# Altium PCB ArtFire.PcbDoc
Units mm, origin at the board's own origin, x right, y up, seen from the top; angles counter-clockwise.
Board outline 100.33 x 88.9 mm, 2 copper layers (Top Layer, Bottom Layer); 100 components, 80 nets, 357 pads, 159 vias.
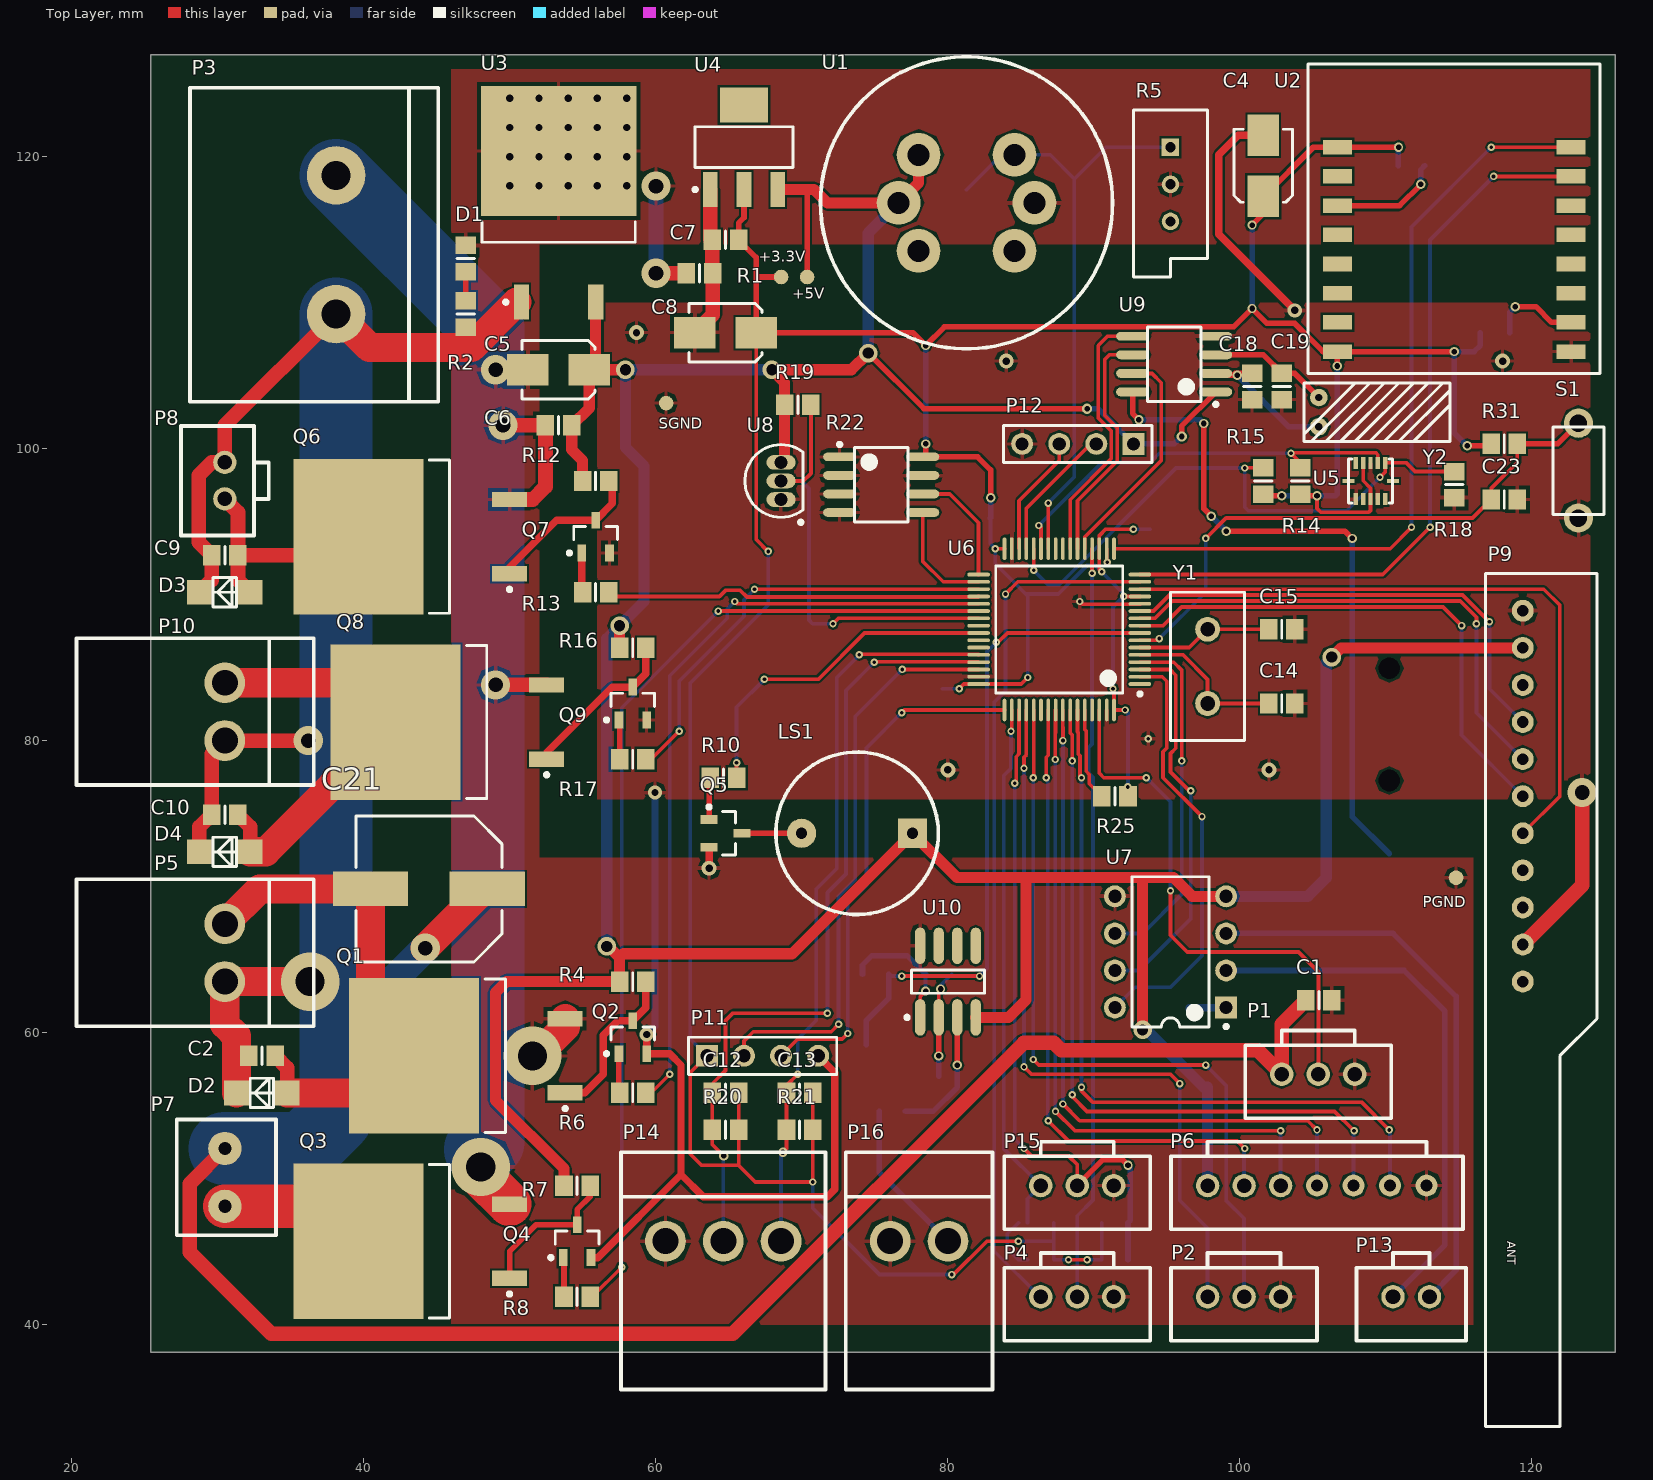
[diagram p0: Top Layer view]
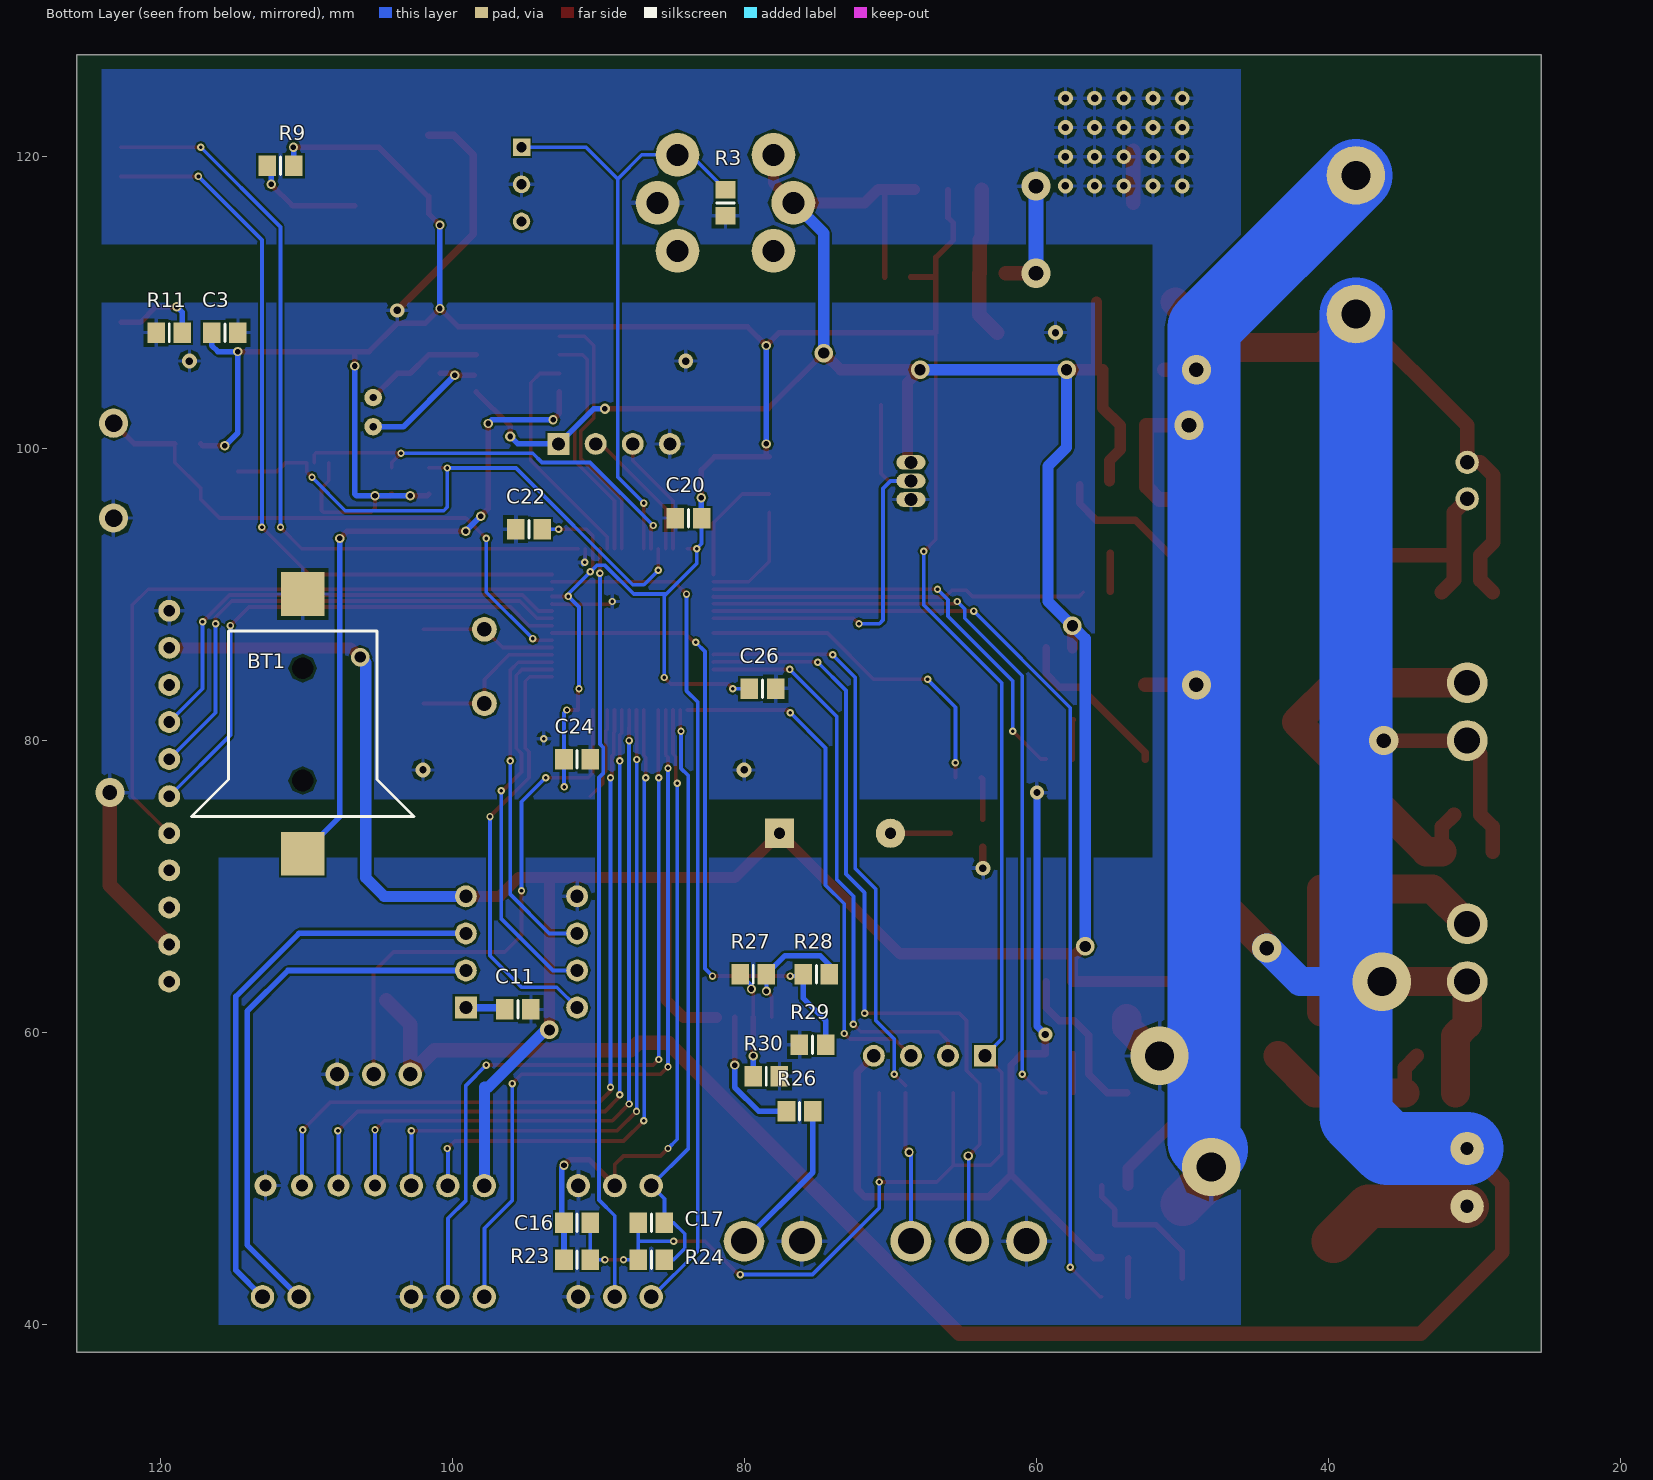
[diagram p1: Bottom Layer view, seen from below]

## Layer stack, top to bottom
Top Solder: solder mask 0.0102, Solder Resist, Dk 3.5
Top Layer: signal copper 0.0356
Dielectric 1: dielectric 0.32, FR-4, Dk 4.8
Bottom Layer: signal copper 0.0356
Bottom Solder: solder mask 0.0102, Solder Resist, Dk 3.5

## Board outline
25.4,38.1 125.73,38.1 125.73,127 25.4,127

## Design rules (kind name [scope] priority, off if disabled: settings)
Clearance [All] p1: gap=0.152
PolygonConnect [All] p1: connectstyle=Relief reliefconductorwidth=0.254 reliefentries=4 polygonreliefangle="90 Angle" airgapwidth=0.254
RoutingVias [All] p1: holewidth=0.254 width=0.254 viastyle="Through Hole" minholewidth=0.254 minwidth=0.483 maxholewidth=10 maxwidth=10
SolderMaskExpansion [All] p1: expansion=0.102
UnpouredPolygon [All] p1: allowunpoured=FALSE
Width [All] p1: maxlimit=10 minlimit=0.25 preferedwidth=0.25
29 further rules are at their usual default settings.

## Components (designator, comment, footprint, x,y, rotation, side; value= is the part's Value field where it differs from the comment)
BT1 "Battery" Battery_1302 110.236,72.263 r90 bottom
C1 "Cap Semi" 6-0805_N 105.41,62.23 r0 top
C2 "Cap Semi" 6-0805_N 33.02,58.42 r0 top
C3 "Cap Semi" 6-0805_N 115.57,107.95 r180 bottom
C4 "Cap Pol1" Cap_5*4mm 101.6,119.38 r90 top
C5 "Cap Pol1" Cap_5*4mm 53.34,105.41 r180 top
C6 "Cap Semi" 6-0805_N 53.34,101.6 r180 top
C7 "Cap Semi" 6-0805_N 64.77,114.3 r180 top
C8 "Cap Pol1" Cap_5*4mm 64.77,107.95 r180 top
C9 "Cap Semi" 6-0805_N 30.48,92.71 r0 top
C10 "Cap Semi" 6-0805_N 30.48,74.93 r0 top
C11 "Cap Semi" 6-0805_N 95.504,61.595 r0 bottom
C12 "Cap Semi" 6-0805_N 64.77,55.88 r0 top
C13 "Cap Semi" 6-0805_N 69.85,55.88 r0 top
C14 "Cap Semi" 6-0805_N 102.87,82.55 r0 top
C15 "Cap Semi" 6-0805_N 102.87,87.63 r0 top
C16 "Cap Semi" 6-0805_N 91.44,46.99 r180 bottom
C17 "Cap Semi" 6-0805_N 86.36,46.99 r0 bottom
C18 "Cap Semi" 6-0805_N 100.838,104.267 r90 top
C19 "Cap Semi" 6-0805_N 102.87,104.267 r90 top
C20 "Cap Semi" 6-0805_N 83.82,95.25 r0 bottom
C21 "Cap Pol1" CAP_10*10MM 44.45,69.85 r180 top
C22 "Cap Semi" 6-0805_N 94.742,94.488 r0 bottom
C23 "Cap Semi" 6-0805_N 118.11,96.52 r180 top
C24 "Cap Semi" 6-0805_N 91.44,78.74 r180 bottom
C26 "Cap Semi" 6-0805_N 78.74,83.566 r180 bottom
D1 "PWR" 6-0805_N 46.99,113.03 r90 top
D2 "Diode" US1M 33.02,55.88 r180 top
D3 "Diode" US1M 30.48,90.17 r180 top
D4 "Diode" US1M 30.48,72.39 r180 top
LS1 "Buzzer" BUZZER 73.787,73.66 r0 top
P1 "Pump1" XH2.54-3P 102.87,57.15 r0 top
P2 "Alcohol_Detect" XH2.54-3P 97.79,41.91 r0 top
P3 "HB-9500" HB-9500 38.1,109.22 r90 top
P4 "Alcohol_Detect_C" XH2.54-3P 86.36,41.91 r0 top
P5 "Pump2" CH3.96_2P 30.48,63.5 r90 top
P6 "XH2.54-7P" XH2.54-7P 97.79,49.53 r0 top
P7 "Fire_Up" KF3.96_2P 30.48,52.07 r0 top
P8 "Fan" XH2.54-2P 30.48,99.06 r270 top
P9 "Superheterodyne_Receiver" Sperheterodyne_Receiver 119.38,63.5 r180 top
P10 "Pump_BAK" CH3.96_2P 30.48,80.01 r90 top
P11 "Debug_Port" HDR1X4 63.5,58.42 r0 top
P12 "UART_Debug_Port" HDR1X4 92.71,100.33 r180 top
P13 "Speaker" XH2.54-2P 110.49,41.91 r0 top
P14 "Fire_Detect" CH3.96_3P 68.58,45.72 r180 top
P15 "Leakage_Detect" XH2.54-3P 86.36,49.53 r0 top
P16 "Thermocouple" CH3.96_2P 80.01,45.72 r180 top
Q1 "ADO484" D2PAK_N 46.99,58.42 r180 top
Q2 "NPN" SOT-23_N 58.42,59.69 r90 top
Q3 "ADO484" D2PAK_N 43.18,45.72 r180 top
Q4 "NPN" SOT-23_N 54.61,45.72 r90 top
Q5 "NPN" SOT-23_N 64.77,73.66 r0 top
Q6 "ADO484" D2PAK_N 43.18,93.98 r180 top
Q7 "NPN" SOT-23_N 55.88,93.98 r90 top
Q8 "ADO484" D2PAK_N 45.72,81.28 r180 top
Q9 "NPN" SOT-23_N 58.42,82.55 r90 top
R1 "Res3" 6-0805_N 62.992,112.014 r0 top
R2 "Res" 6-0805_N 46.99,109.22 r270 top
R3 "Res3" 6-0805_N 81.28,116.84 r270 bottom
R4 "Res3" 6-0805_N 58.42,63.5 r0 top
R5 "Res_Pot" VR5 95.25,120.65 r270 top
R6 "Res3" 6-0805_N 58.42,55.88 r180 top
R7 "Res3" 6-0805_N 54.61,49.53 r0 top
R8 "Res3" 6-0805_N 54.61,41.91 r180 top
R9 "Res3" 6-0805_N 111.76,119.38 r180 bottom
R10 "Res3" 6-0805_N 64.643,77.47 r0 top
R11 "Res3" 6-0805_N 119.38,107.95 r0 bottom
R12 "Res3" 6-0805_N 55.88,97.79 r0 top
R13 "Res3" 6-0805_N 55.88,90.17 r180 top
R14 "Res3" 6-0805_N 104.14,97.79 r90 top
R15 "Res3" 6-0805_N 101.6,97.79 r90 top
R16 "Res3" 6-0805_N 58.42,86.36 r0 top
R17 "Res3" 6-0805_N 58.42,78.74 r180 top
R18 "Res3" 6-0805_N 114.681,97.536 r90 top
R19 "Res3" 6-0805_N 69.723,102.997 r180 top
R20 "Res3" 6-0805_N 64.77,53.34 r0 top
R21 "Res3" 6-0805_N 69.85,53.34 r0 top
R22 "AT24C02" SOP8_TDA2822 75.438,97.536 r0 top
R23 "Res3" 6-0805_N 91.44,44.45 r180 bottom
R24 "Res3" 6-0805_N 86.36,44.45 r0 bottom
R25 "Res3" 6-0805_N 91.44,76.2 r180 top
R26 "Res3" 6-0805_N 76.2,54.61 r0 bottom
R27 "Res3" 6-0805_N 79.375,64.008 r180 bottom
R28 "Res3" 6-0805_N 75.057,64.008 r180 bottom
R29 "Res3" 6-0805_N 75.311,59.182 r180 bottom
R30 "Res3" 6-0805_N 78.486,57.023 r0 bottom
R31 "Res3" 6-0805_N 118.11,100.33 r0 top
S1 "Reset" SWP_PB_6.5mm 123.19,95.25 r90 top
U1 "MQ_Alcohol" MQ 81.28,116.84 r0 top
U2 "ESP-07" ESP-07_Wifi 106.68,120.65 r0 top
U3 "L7805CD2T-TR" D2PAK_N 53.34,116.84 r90 top
U4 "AMS1117" SOT223_N 66.04,120.65 r90 top
U5 "MMA7660FC" DFN-10P 107.95,97.79 r0 top
U6 "STM32F103RBT7" LQFP64_L 87.63,87.63 r180 top
U7 "YF017" DIP-8 95.25,65.532 r180 top
U8 "DS18B20" TO-92A 68.58,97.79 r0 top
U9 "DS1302" SOP8_TDA2822 95.504,105.791 r180 top
U10 "LM358AMX" M08A_M 80.01,63.5 r90 top
Y1 "XTAL" XTAL 97.79,85.09 r270 top
Y2 "XTAL" 32.768Cystal 105.41,103.505 r0 top

## Footprints (in the part's own frame and the unit in brackets; to place one, negate y for a bottom-side part, rotate by r counter-clockwise, add the part's x,y. Pads: shape width x height; smd on the part's side, far side on the other; paste and mask are expansions set on the pad)
6-0805_N [mm] "Chip Resistor, Body 2.0x1.2mm, IPC Medium Density"
  rect 1.2x1.4 smd: 1(-0.9,0) 2(0.9,0)
  silkscreen extent 0,-0.6 0,0.6, body extent -1.07,-0.7 1.07,0.7, height 0.7
32.768Cystal [mm]
  round 1.2 hole 0.5: 1(0,0) 2(0,-2)
  silkscreen extent -1,-3 9,1
Battery_1302 [mm]
  rect 3x3 smd: 1(0,0) 2(17.78,0)
  round 1 hole 1.5: 3(12.7,0) 4(5,0)
  silkscreen extent 2.54,-7.62 15.24,7.62
BUZZER [mm]
  rect 2x2 hole 0.762: 1(3.8,0)
  round 2 hole 0.762: 2(-3.8,0)
  silkscreen extent -5.56,-5.57 5.57,5.57
Cap_5*4mm [mm]
  rect 2.85x2.15 smd: 1(-2.1,0) 2(2.1,0)
  silkscreen extent -2.5,-2 2.5,2, body extent -2.5,-2 2.5,2, height 6
CAP_10*10MM [mm]
  rect 5.15x2.35 smd: 1(-4,0) 2(4,0)
  silkscreen extent -5,-5 5,5, body extent -5,-5 5,5, height 10
CH3.96_2P [mil]
  round 110 hole 70: 1(0,0) 2(155.91,0)
  silkscreen extent -120,-240 276,400
CH3.96_3P [mil]
  round 110 hole 70: 1(0,0) 2(155.91,0) 3(311.81,0)
  silkscreen extent -120,-240 432,400
D2PAK_N [mm] "D2-PAK, 4-Leads, Body 8.8x10.4mm, Pitch 2.54mm, Lead Span 15.1mm, IPC Medium Density"
  rect 2.4x1.05 smd: 1(-6.8,2.54) 3(-6.8,-2.54)
  rect 8.9x10.65 smd: 2(3.55,0)
  silkscreen extent -6.93,-5.25 -1.3,5.25, body extent -2.7,-5.28 6.3,5.28, height 4.69
DFN-10P [mm]
  rect 0.825x0.3 smd: 0(-0.508,0) 0(2.54,0)
  rect 0.3x0.825 smd: 1(0,-1.24) 2(0.5,-1.24) 3(1,-1.24) 4(1.5,-1.24) 5(2,-1.24) 6(2,1.24) 7(1.5,1.24) 8(1,1.24) 9(0.5,1.24) 10(0,1.24)
  silkscreen extent -0.5,-1.5 2.5,1.5
DIP-8 [mm] "DIP; 8 Leads; Row Spacing 7.62 mm; Pitch 2.54 mm"
  rect 1.5x1.5 hole 0.9: 1(-3.81,3.81)
  round 1.5 hole 0.9: 2(-3.81,1.27) 3(-3.81,-1.27) 4(-3.81,-3.81) 5(3.81,-3.81) 6(3.81,-1.27) 7(3.81,1.27) 8(3.81,3.81)
  silkscreen extent -3.94,-5.15 2.65,5.23, body extent -3.6,-5.15 3.6,5.15, height 5.08
ESP-07_Wifi [mm]
  rect 2x1 smd: 1(0,0) 2(0,-2) 3(0,-4) 4(0,-6) 5(0,-8) 6(0,-10) 7(0,-12) 8(0,-14) 9(16,-14) 10(16,-12) 11(16,-10) 12(16,-8) 13(16,-6) 14(16,-4) 15(16,-2) 16(16,0)
  silkscreen extent -2,-15.5 18,5.7
HB-9500 [mm]
  round 4 hole 2: 1(0,0) 2(9.5,0)
  silkscreen extent -6,-7 15.5,10
HDR1X4 [mm] "Connector; Header; 4 Position"
  rect 1.5x1.5 hole 0.9: 1(0,0)
  round 1.5 hole 0.9: 2(2.54,0) 3(5.08,0) 4(7.62,0)
  silkscreen extent -1.27,-1.27 8.89,1.27
KF3.96_2P [mil]
  round 90 hole 35.43: 1(0,0) 2(0,-155.91)
  silkscreen extent -130,-234 138,78
LQFP64_L [mm] "Thin QFP, 64-Leads, Body 10x10mm, Pitch 0.5mm, IPC High Density"
  oval 1.55x0.25 smd: 1(-5.525,3.75) 2(-5.525,3.25) 3(-5.525,2.75) 4(-5.525,2.25) 5(-5.525,1.75) 6(-5.525,1.25) 7(-5.525,0.75) 8(-5.525,0.25) 9(-5.525,-0.25) 10(-5.525,-0.75) 11(-5.525,-1.25) 12(-5.525,-1.75) 13(-5.525,-2.25) 14(-5.525,-2.75) 15(-5.525,-3.25) 16(-5.525,-3.75) 33(5.525,-3.75) 34(5.525,-3.25) 35(5.525,-2.75) 36(5.525,-2.25) 37(5.525,-1.75) 38(5.525,-1.25) 39(5.525,-0.75) 40(5.525,-0.25) 41(5.525,0.25) 42(5.525,0.75) 43(5.525,1.25) 44(5.525,1.75) 45(5.525,2.25) 46(5.525,2.75) 47(5.525,3.25) 48(5.525,3.75)
  oval 0.25x1.55 smd: 17(-3.75,-5.525) 18(-3.25,-5.525) 19(-2.75,-5.525) 20(-2.25,-5.525) 21(-1.75,-5.525) 22(-1.25,-5.525) 23(-0.75,-5.525) 24(-0.25,-5.525) 25(0.25,-5.525) 26(0.75,-5.525) 27(1.25,-5.525) 28(1.75,-5.525) 29(2.25,-5.525) 30(2.75,-5.525) 31(3.25,-5.525) 32(3.75,-5.525) 49(3.75,5.525) 50(3.25,5.525) 51(2.75,5.525) 52(2.25,5.525) 53(1.75,5.525) 54(1.25,5.525) 55(0.75,5.525) 56(0.25,5.525) 57(-0.25,5.525) 58(-0.75,5.525) 59(-1.25,5.525) 60(-1.75,5.525) 61(-2.25,5.525) 62(-2.75,5.525) 63(-3.25,5.525) 64(-3.75,5.525)
  silkscreen extent -5.65,-4.35 4.35,4.55, body extent -5,-5 5,5, height 1.6
M08A_M [mm] "SOIC, 8-Leads, Body 4.9x3.9mm, Pitch 1.27mm, IPC Low Density"
  oval 2.5x0.7 smd: 1(-2.45,1.905) 2(-2.45,0.635) 3(-2.45,-0.635) 4(-2.45,-1.905) 5(2.45,-1.905) 6(2.45,-0.635) 7(2.45,0.635) 8(2.45,1.905)
  silkscreen extent -2.57,-2.5 0.8,2.93, body extent -2,-2.5 2,2.5, height 1.75
MQ [mm]
  round 3 hole 1.5: 1(-3.288,3.288) 2(-4.65,0) 3(-3.288,-3.288) 4(3.288,-3.288) 5(4.65,0) 6(3.288,3.288)
  silkscreen extent -10,-10 10,10
SOP8_TDA2822 [mm] "TSOP, 8-Leads, Body 5.00x3.95mm, Pitch 1.27mm, IPC Medium Density"
  oval 2.25x0.6 smd: 1(-2.85,1.905) 2(-2.85,0.635) 3(-2.85,-0.635) 4(-2.85,-1.905) 5(2.85,-1.905) 6(2.85,-0.635) 7(2.85,0.635) 8(2.85,1.905)
  silkscreen extent -2.97,-2.55 1.83,2.88, body extent -2,-2.55 2,2.55, height 1.55
SOT223_N [mm] "SOT223, 4-Leads, Body 6.5x3.5mm, Pitch 2.3mm, Lead Span 7mm, IPC Medium Density"
  rect 2.4x1 smd: 1(-2.9,2.3) 2(-2.9,0) 3(-2.9,-2.3)
  rect 2.4x3.3 smd: 4(2.9,0)
  silkscreen extent -3.02,-3.35 1.4,3.47, body extent -1.85,-3.35 1.85,3.35, height 1.7
SOT-23_N [mm] "SOT23, 3-Leads, Body 2.9x1.3mm, Pitch 0.95mm, Lead Span 2.5mm, IPC Medium Density"
  rect 1.15x0.6 smd: 1(-1.125,0.95) 2(-1.125,-0.95) 3(1.125,0)
  silkscreen extent -1.25,-1.5 0.7,1.92, body extent -0.7,-1.5 0.7,1.5, height 1.1
Sperheterodyne_Receiver [mm]
  round 1.5 hole 0.8: 1(0,0) 2(0,-2.54) 3(0,-5.08) 4(0,-7.62) 5(0,-10.16) 6(0,-12.7) 7(0,-15.24) 8(0,-17.78) 9(0,-20.32) 10(0,-22.86) 11(0,-25.4)
  silkscreen extent -5.08,-27.94 2.54,30.48
SWP_PB_6.5mm [mm]
  round 2 hole 1.2: 1(0,0) 2(6.5,0)
  silkscreen extent 0.25,-1.75 6.25,1.75
TO-92A [mm] "TO, Flat Index; 3 In-Line, Axial Leads; Body Dia. 4.5mm; Leads 0.51 x 0.48 mm (max)"
  oval 2x1 hole 0.9: 1(0,-1.27) 2(0,0) 3(0,1.27)
  silkscreen extent -2.48,-2.95 1.5,2.48, body extent -2.5,-2.5 1.5,2.5, height 6.86
US1M [mm]
  rect 1.7x1.7 smd: 1(-1.74,0) 2(1.74,0)
  silkscreen extent -0.8,-1 0.8,1
VR5 [mm]
  rect 1.2x1.2 hole 0.7: 1(0,0)
  round 1.2 hole 0.7: 2(2.54,0) 3(5.08,0)
  silkscreen extent -2.54,-2.54 8.89,2.54
XH2.54-2P [mm]
  round 1.6 hole 1: 1(0,0) 2(2.5,0)
  silkscreen extent -2.5,-3 5,3
XH2.54-3P [mm]
  round 1.6 hole 1: 1(0,0) 2(2.5,0) 3(5,0)
  silkscreen extent -2.5,-3 7.5,3
XH2.54-7P [mm]
  round 1.6 hole 1: 1(0,0) 2(2.5,0) 3(5,0)
  round 1.5 hole 0.8: 4(7.5,0) 5(10,0) 6(12.5,0) 7(15,0)
  silkscreen extent -2.5,-3 17.5,3
XTAL [mm]
  round 1.7 hole 1: 1(-2.54,0) 2(2.54,0)
  silkscreen extent -5.08,-2.54 5.08,2.54

## Part data
BT1: "Multicell Battery"
C1 C2 C3 C6 C7 C9 C10 C11 C12 C13 C14 C15 C16 C17 C18 C19 C20 C22 C23 C24 C26: "Capacitor (Semiconductor SIM Model)"
C4 C5 C8 C21: "Polarized Capacitor (Radial)"
D1: library part LED0, "Typical INFRARED GaAs LED"
D2 D3 D4: library part "Diode BAT17", "Silicon RF Schottky Diode for Mixer Applications in the VHF/UHF Range"
LS1: "Magnetic Transducer Buzzer"
P1 P2 P4 P15: library part XH2.54-3P
P3: "High current connector"
P5 P10 P16: library part CH3.96_2P
P7: library part KF3.96
P8 P13: library part XH2.54-2P
P11 P12: library part "Header 4", "Header, 4-Pin"
P14: library part CH3.96_3P
Q1 Q3 Q6 Q8: library part NMOS-2, "N-Channel Power MOSFET"
Q2 Q4 Q5 Q7 Q9: "NPN Bipolar Transistor"
R1 R3 R4 R6 R7 R8 R9 R10 R11 R12 R13 R14 R15 R16 R17 R18 R19 R20 R21 R23 R24 R25 R26 R27 R28 R29 R30 R31: "Resistor"
R2: library part Res1, "Resistor"
S1: library part SW-PB, "Switch"
U1: library part MQ
U2: library part ESP-07_Wifi
U3: library part CMP-0244-00485-1, "Positive Voltage Regulator, 5V, 3-Pin TO-220"
U6: library part CMP-0237-00161-1, "STM32 ARM-based 32-bit MCU Performance Line with 128 kB Flash, 20 kB Internal RAM, -40 to +105°C Temperature, 64-Pin LQFP, Tray"
U10: library part CMP-0055-00768-2, "Low Power Dual Operational Amplifier, 8-pin Narrow SOIC"
Y1 Y2: "Crystal Oscillator"

## Free pads (board coordinates)
  round 1 smd: 0(114.808,70.612) 1(60.706,103.124) 3(68.58,111.76) 4(70.358,111.76)

## Via types
v1: diameter 0.508, hole 0.254, Top Layer to Bottom Layer, 84 vias
v2: diameter 1.016, hole 0.508, Top Layer to Bottom Layer, 26 vias
v3: diameter 0.635, hole 0.381, Top Layer to Bottom Layer, 26 vias
v4: diameter 2, hole 1, Top Layer to Bottom Layer, 8 vias
v5: diameter 1.27, hole 0.762, Top Layer to Bottom Layer, 7 vias
v6: diameter 4, hole 2, Top Layer to Bottom Layer, 3 vias
v7: diameter 0.965, hole 0.508, Top Layer to Bottom Layer, 3 vias
v8: diameter 0.711, hole 0.381, Top Layer to Bottom Layer, 2 vias

## Nets (pads, with @x,y where several pads share a name; then routed paths per layer and width w, separated by ;. In a path a pad name is that pad's centre, name@x,y a point inside that pad or via, vN(x,y) a via of type N, cw(c..) or ccw(c..) an arc to the next point about the centre after c; other vN are vias at no path point)
+3.3V: C3.1 C4.1 C7.1 C8.1 C12.2 C13.2 C16.2 C17.2 C20.1 C22.1 C24.1 C26.1 P11.1 pad.3 R9.2 R14.1 R15.1 R20.2 R21.2 R22.8 R23.2 R24.2 R25.1 R31.1 U2.1 U2.8 U4.2 U5.3 U5.9 U6.13 U6.19 U6.32 U6.48 U6.64 | length 292.2
  Top Layer w0.254: P11.1 62.357,57.277 62.357,51.689 63.13,50.916 65.67,50.916 ; C12.2 R20.2 65.67,50.916 ; C8.1 66.87,93.785 v1(67.691,92.964) ; C13.2 R21.2 v1(70.75,49.773) 66.813,49.773 65.67,50.916 ; v1(80.264,43.434) 80.391,43.434 82.677,45.72 v1(84.836,45.72) ; v1(80.772,83.566) 81.086,83.88 U6.48 85.023,83.88 v1(85.471,84.328) ; v1(83.248,93.155) U6.32 ; v1(88.265,44.45) v1(89.535,44.45) ; v1(90.547,91.563) 90.38,91.73 U6.19 90.38,94.063 90.805,94.488 v1(92.71,94.488) ; v1(91.313,83.566) 91.38,83.499 U6.64 v1(92.139,82.105) ; v1(92.039,89.88) U6.13 ; v3(105.283,96.774) 105.283,95.91 105.537,95.656 108.839,95.656 108.95,95.767 U5.3 108.95,97.298 108.45,97.798 U5.9
  Top Layer w0.381: U4.2 66.04,115.824 65.67,115.454 C7.1 66.87,113.1 66.87,111.76 ; pad.3 66.87,111.76 ; R22.8 82.042,99.441 82.931,98.552 v3(82.931,96.647) ; R22.8@78.486,99.639 v3(78.486,100.33) ; v3(100.838,115.316) 101.6,116.078 C4.1 101.659,117.28 105.029,120.65 U2.1 v3(110.871,120.65) ; R15.1 101.716,96.774 v3(102.87,96.774) ; R14.1 104.256,96.774 v3(105.283,96.774) ; v3(106.68,105.664) U2.8 ; v3(114.681,106.65) U2.8 ; v3(115.57,100.203) 117.083,100.203 R31.1 ; 66.87,111.76 C8.1 77.597,107.95 v3(78.486,107.061) 79.764,108.339 99.576,108.339 v3(100.838,109.601) 101.854,108.585 103.759,108.585 105.694,106.65 U2.8
  Bottom Layer w0.254: P11.1 62.357,59.563 62.357,83.947 67.691,89.281 v1(67.691,92.964) ; v1(70.75,49.773) 70.75,47.995 75.311,43.434 v1(80.264,43.434) ; C26.1 v1(80.772,83.566) ; C20.1 82.92,93.483 v1(83.248,93.155) 83.248,92.139 85.344,90.043 ; v1(84.836,45.72) 87.26,45.72 ; v1(85.471,84.328) 85.471,89.916 85.344,90.043 ; C17.2 87.26,45.72 ; v1(88.265,44.45) R24.2 87.26,45.72 ; v1(89.535,44.45) R23.2 C16.2 ; v1(91.313,83.566) 91.313,89.154 v1(92.039,89.88) 92.039,90.071 v1(90.547,91.563) 90.101,92.009 89.536,92.009 87.57,90.043 85.344,90.043 ; v1(92.139,82.105) 92.34,81.904 C24.1 92.34,76.846 v1(92.329,76.835) ; v1(92.71,94.488) C22.1
  Bottom Layer w0.381: v3(78.486,100.33) v3(78.486,107.061) ; C20.1 82.931,95.261 v3(82.931,96.647) ; v3(100.838,109.601) v3(100.838,115.316) ; v3(102.87,96.774) v3(105.283,96.774) 106.553,96.774 106.68,96.901 v3(106.68,105.664) ; R9.2 110.86,120.639 v3(110.871,120.65) ; v3(115.57,100.203) 114.681,101.092 v3(114.681,106.65) 116.048,106.65 116.47,107.072 C3.1
+5V: C5.1 C6.1 LS1.1 P6.1 P9.10 P12.1 pad.4 R4.1 R7.1 R12.1 R16.1 R19.2 U1.1 U1.2 U3.3 U4.3 U7.4 U8.3 U9.1 U10.4 | length 284
  Top Layer w0.381: pad.4 70.358,117.496 ; v5(74.549,106.553) 78.359,102.743 v8(89.535,102.743) ; v8(96.012,100.838) 96.012,101.544 U9.1
  Top Layer w0.762: R7.1 53.71,50.684 49.022,55.372 49.022,62.738 49.784,63.5 R4.1 57.52,65.14 ; R12.1 54.98,99.198 54.24,99.938 C6.1 55.44,102.8 C5.1 v5(57.912,105.41) ; C5.1@55.88,105.85 U3.3 ; v5(56.642,65.913) 56.747,65.913 57.52,65.14 ; R16.1 v5(57.52,87.873) ; U4.3 70.845,117.75 71.755,116.84 U1.2 77.992,118.202 U1.1 ; U8.3@68.823,99.303 R19.2 68.823,104.532 v5(67.945,105.41) 73.406,105.41 v5@74.486,106.489 ; U10.4 84.164,61.05 85.344,62.23 85.344,70.625 ; v5(93.345,60.198) 93.345,70.625 ; U7.4 96.745,69.342 95.461,70.625 85.344,70.625 ; v5(106.299,85.725) 106.934,86.36 P9.10 ; 57.52,65.14 57.785,65.405 69.332,65.405 LS1.1 80.622,70.625 85.344,70.625
  Bottom Layer w0.381: v8(89.535,102.743) 90.297,102.743 P12.1 95.504,100.33 v8(96.012,100.838)
  Bottom Layer w0.762: v5(56.642,65.913) 56.642,86.995 v5(57.52,87.873) 59.182,89.535 59.182,98.806 57.912,100.076 v5(57.912,105.41) v5(67.945,105.41) ; v5(74.549,106.553) 74.549,114.759 U1.2 ; v5(93.345,60.198) 93.599,60.198 97.536,56.261 97.79,56.261 P6.1 ; U7.4 104.648,69.342 105.918,70.612 105.918,85.344 v5(106.299,85.725)
+12V: C1.1 C2.1 C9.1 C10.1 C21.1 D2.2 D3.2 D4.2 P1.1 P3.1 P5.1 P7.1 P8.1 P10.1 R2.2 U3.1 | length 245.2
  Top Layer w0.381: R2.2 R2.2@47.36,107.95
  Top Layer w1: D4.2 28.74,74.09 C10.1 29.58,79.11 P10.1 v4(36.195,80.01) ; D3.2 29.58,91.01 C9.1 28.702,93.588 28.702,98.171 29.591,99.06 P8.1 30.48,101.6 P3.1 ; P7.1 28.067,49.657 28.067,44.958 33.655,39.37 65.278,39.37 85.217,59.309 87.249,59.309 87.757,58.801 101.219,58.801 P1.1 102.87,60.59 C1.1
  Top Layer w2: D2.2 31.28,59.779 30.48,60.579 P5.1 v6(36.322,63.5) ; P3.1 40.386,106.934 47.371,106.934 U3.1@50.477,110.04 ; v4(44.205,65.795) 48.006,69.596 C21.1@48.196,69.596
  Bottom Layer w2: v6(36.322,63.5) 38.1,63.5 41.91,63.5 v4(44.205,65.795)
  Bottom Layer w5: P7.1 35.941,52.07 38.1,54.229 38.1,63.5 P3.1
ADH: P2.1 U6.52 | length 51.1
  Top Layer w0.254: v1(85.217,57.658) 85.725,57.15 95.25,57.15 v1(95.885,56.515) ; v1(85.217,78.105) 85.217,78.867 85.38,79.03 U6.52
  Bottom Layer w0.254: v1(85.217,57.658) v1(85.217,78.105) ; v1(95.885,56.515) 95.885,48.514 97.79,46.609 P2.1
ADL: P2.2 U6.53 | length 52.9
  Top Layer w0.254: v1(85.852,58.166) 86.233,57.785 v1(97.663,57.785) ; v1(85.852,77.47) 85.88,77.498 U6.53
  Bottom Layer w0.254: v1(85.852,58.166) v1(85.852,77.47) ; v1(97.663,57.785) 99.06,56.388 99.06,48.514 100.29,47.284 P2.2
ALCOHOL_C: R3.1 R5.1 U1.6 U6.26 | length 42.6
  Top Layer w0.254: U6.26 v1(86.88,96.278)
  Bottom Layer w0.254: R3.1 83.668,120.128 U1.6 87.009,120.128 88.659,118.478 ; v1(86.88,96.278) 88.659,98.057 88.659,118.478 ; R5.1 90.832,120.65 88.659,118.478
ALDC1: P4.1 U6.15 | length 59.4
  Top Layer w0.254: v1(83.947,90.043) 84.784,90.88 U6.15
  Bottom Layer w0.254: v1(83.947,90.043) 83.947,83.414 83.185,82.652 83.185,45.03 86.305,41.91 P4.1
ALDC2: P4.2 U6.20 | length 51.9
  Top Layer w0.254: v1(89.88,91.476) U6.20
  Bottom Layer w0.254: P4.2 88.86,47.458 89.939,48.537 89.939,77.482 89.661,77.761 89.661,79.556 89.88,79.775 v1(89.88,91.476)
BEE: R10.2 U6.41 | length 23.5
  Top Layer w0.254: R10.2@65.532,77.481 v1(65.532,78.486) ; v1(67.437,84.201) 71.12,84.201 74.299,87.38 U6.41
  Bottom Layer w0.254: v1(65.532,78.486) 65.532,82.296 v1(67.437,84.201)
DEBUG_RX: P12.2 U6.29 | length 9.4
  Top Layer w0.254: U6.29 85.38,95.921 89.789,100.33 P12.2
DEBUG_TX: P12.3 U6.30 | length 8.3
  Top Layer w0.254: U6.30 84.88,96.437 87.63,99.187 P12.3
E2_SCL: R22.6 U6.33 | length 8.2
  Top Layer w0.254: R22.6 80.137,96.901 82.105,94.933 U6.33
E2_SDA: R22.5 U6.34 | length 7.8
  Top Layer w0.254: R22.5 78.288,92.273 79.681,90.88 U6.34
FAN: R13.1 U6.36 | length 25.8
  Top Layer w0.254: R13.1 57.07,89.88 64.353,89.88 64.77,90.297 65.786,90.297 66.236,89.847 82.105,89.847 U6.36
FHD: C13.1 P14.1 R21.1 U6.44 | length 50.1
  Top Layer w0.254: v3(68.707,51.816) 68.95,52.059 R21.1 C13.1 ; C13.1@68.95,56.377 v1(69.723,57.15) ; v1(73.942,85.88) 73.975,85.913 82.105,85.913 U6.44
  Bottom Layer w0.254: P14.1 68.58,51.689 v3(68.707,51.816) ; v1(69.723,57.15) 69.723,59.563 70.993,60.833 70.993,69.85 72.39,71.247 72.39,84.328 v1(73.942,85.88)
FIRE_TEM_D: R28.1 R29.2 U6.8 | length 45.1
  Top Layer w0.254: v1(76.835,63.881) v1(82.169,63.881) ; v1(83.312,86.741) 83.439,86.741 84.078,87.38 U6.8
  Bottom Layer w0.254: R28.1@75.957,63.881 v1(76.835,63.881) ; v1(82.169,63.881) 82.677,64.389 82.677,86.106 v1(83.312,86.741)
  Bottom Layer w0.381: R29.2 74.411,60.822 75.957,62.368 75.957,63.881 R28.1
FIRE_UP: R8.1 U6.38 | length 68.5
  Top Layer w0.254: R8.1 55.626,41.91 v1(57.658,43.942) ; v1(64.282,88.88) U6.38
  Bottom Layer w0.254: v1(57.658,43.942) 57.658,82.256 v1(64.282,88.88)
FLD: C12.1 P14.2 R20.1 U6.45 | length 55.6
  Top Layer w0.254: v3(64.643,51.562) 63.87,52.335 R20.1 C12.1 63.87,56.504 64.77,57.404 64.77,60.833 65.278,61.341 v1(71.755,61.341) ; v1(74.966,85.38) 74.999,85.413 82.105,85.413 U6.45
  Bottom Layer w0.254: P14.2 64.62,51.539 v3(64.643,51.562) ; v1(71.755,61.341) 71.755,69.596 73.025,70.866 73.025,83.439 v1(74.966,85.38)
IO1: P6.2 U6.55 | length 45
  Top Layer w0.254: v1(86.741,77.47) 86.741,78.859 86.88,78.998 U6.55 ; v1(86.868,53.975) 88.265,52.578 99.822,52.578 v1(100.33,52.07)
  Bottom Layer w0.254: v1(86.741,77.47) 86.843,77.368 86.843,54 v1(86.868,53.975) ; P6.2 100.29,52.03 v1(100.33,52.07)
IO2: P6.3 U6.56 | length 47.2
  Top Layer w0.254: v1(87.351,78.715) 87.351,80.518 87.376,80.543 87.376,82.101 U6.56 ; v1(87.376,54.61) 88.693,53.293 v1(102.79,53.293)
  Bottom Layer w0.254: v1(87.351,78.715) 87.351,54.635 v1(87.376,54.61) ; P6.3 v1(102.79,53.293)
IO3: P6.4 U6.57 | length 48.9
  Top Layer w0.254: U6.57 87.88,80.903 87.884,80.899 v1(87.884,80.01) ; v1(87.884,55.118) 89.027,53.975 104.648,53.975 v1(105.283,53.34)
  Bottom Layer w0.254: v1(87.884,55.118) v1(87.884,80.01) ; v1(105.283,53.34) 105.29,53.333 P6.4
IO4: P6.5 U6.58 | length 50.6
  Top Layer w0.254: U6.58 88.38,80.53 88.519,80.391 v1(88.519,78.613) ; v1(88.519,55.753) 88.519,55.626 89.535,54.61 106.492,54.61 v1(107.823,53.279)
  Bottom Layer w0.254: v1(88.519,55.753) v1(88.519,78.613) ; P6.5 107.79,53.246 v1(107.823,53.279)
IO5: P6.6 U6.59 | length 52.2
  Top Layer w0.254: U6.59 88.88,80.605 88.925,80.559 88.925,79.088 89.052,78.961 89.052,77.572 v1(89.154,77.47) ; v1(89.154,56.261) 89.154,56.007 89.916,55.245 108.331,55.245 v1(110.236,53.34)
  Bottom Layer w0.254: v1(89.154,56.261) v1(89.154,77.47) ; v1(110.236,53.34) 110.29,53.286 P6.6
LDHD: C17.1 P15.1 R24.1 U6.50 | length 40.6
  Top Layer w0.254: v1(84.328,80.645) 84.38,80.697 U6.50
  Bottom Layer w0.254: v1(84.328,80.645) 84.328,78.105 83.82,77.597 83.82,52.07 P15.1 85.46,48.63 C17.1 ; 84.836,46.99 84.074,46.228 84.074,45.212 84.836,44.45 R24.1
LDLD: C16.1 P15.2 R23.1 U6.51 | length 46.9
  Top Layer w0.254: v1(84.582,77.089) 84.684,77.191 84.684,78.908 84.88,79.105 U6.51 ; v1(85.217,52.07) 85.725,51.562 88.265,51.562 88.86,50.967 P15.2
  Top Layer w0.381: P15.2 90.638,51.308 91.948,51.308 v3(92.34,50.916)
  Bottom Layer w0.254: v1(84.582,77.089) 84.582,52.705 v1(85.217,52.07)
  Bottom Layer w0.381: R23.1 C16.1 92.503,47.153 92.503,50.753 v3(92.34,50.916)
MMA_SCL: R15.2 R18.2 U5.6 U6.28 | length 40
  Top Layer w0.254: v1(85.88,91.666) U6.28 ; v1(100.33,98.679) 100.341,98.69 R15.2 ; v1(109.601,98.044) 109.95,98.393 U5.6 111.409,99.03 112.003,98.436 R18.2
  Bottom Layer w0.254: v1(85.88,91.666) 86.868,90.678 87.63,90.678 95.631,98.679 v1(100.33,98.679) 100.33,96.012 100.584,95.758 107.315,95.758 v1(109.601,98.044)
MMA_SDA: R14.2 U5.7 U6.27 | length 28.8
  Top Layer w0.254: v1(86.233,94.742) 86.38,94.595 U6.27 ; R14.2 104.14,99.06 v1(103.505,99.695) 103.532,99.722 109.32,99.722 109.45,99.592 U5.7
  Bottom Layer w0.254: v1(86.233,94.742) 90.551,99.06 93.853,99.06 94.488,99.695 v1(103.505,99.695)
NetBT1_1: BT1.1 U9.8 | length 46.1
  Top Layer w0.381: U9.8 92.654,102.418 v3(93.091,101.981) ; v3(97.536,101.727) 97.536,95.885 v3(98.044,95.377) ; v3(99.075,94.346) 107.203,94.346 v3(107.696,93.853)
  Bottom Layer w0.381: v3(93.091,101.981) 97.282,101.981 v3(97.536,101.727) ; v3(98.044,95.377) v3(99.075,94.346) ; v3(107.696,93.853) 107.696,74.803 BT1.1
NetC2_2: C2.2 C21.2 D2.1 P5.2 Q1.2 | length 32
  Top Layer w1: C2.2 34.76,57.58 D2.1
  Top Layer w2: P5.2 32.87,69.85 C21.2 Q1.2@40.45,61.41 ; D2.1 40.9,55.88 Q1.2
NetC9_2: C9.2 D3.1 P8.2 Q6.2 | length 15.9
  Top Layer w1: P8.2 31.38,95.66 C9.2 ; D3.1 31.38,91.01 C9.2 ; Q6.2 38.36,92.71 C9.2
NetC10_2: C10.2 D4.1 P10.2 Q8.2 | length 29.3
  Top Layer w1: C10.2 32.22,74.09 D4.1
  Top Layer w2: P10.2 39.48,83.97 Q8.2 33.28,72.39 D4.1
NetC11_2: C11.2 U7.1 | length 2.7
  Bottom Layer w0.254: C11.2 C11.2@96.531,61.722
  Bottom Layer w0.508: C11.2@96.531,61.722 U7.1
NetC14_1: C14.1 U6.5 Y1.2 | length 11.2
  Top Layer w0.254: U6.5 96.111,85.88 97.79,84.201 Y1.2 C14.1
NetC15_1: C15.1 U6.6 Y1.1 | length 9.3
  Top Layer w0.254: U6.6 96.54,86.38 Y1.1 C15.1
NetC18_2: C18.2 U9.2 Y2.2 | length 9.7
  Top Layer w0.381: U9.2@98.481,105.029 v3(99.822,105.029) 99.695,105.156 C18.2@100.827,105.156
  Bottom Layer w0.381: v3(99.822,105.029) 103.346,101.505 Y2.2
NetC19_2: C19.2 U9.3 Y2.1 | length 8.3
  Top Layer w0.381: U9.3 101.611,106.426 C19.2 103.748,105.167 Y2.1
NetC23_2: C23.2 R31.2 S1.2 U6.7 | length 39.5
  Top Layer w0.254: U6.7 94.373,86.88 v1(94.488,86.995) ; v1(97.663,93.853) 99.06,95.25 115.94,95.25 C23.2 117.21,97.271 119.01,99.071 R31.2
  Top Layer w0.381: R31.2 121.77,100.33 S1.2
  Bottom Layer w0.254: v1(94.488,86.995) 97.663,90.17 v1(97.663,93.853)
NetD1_1: D1.1 R2.1 | length 2
  Top Layer w0.381: R2.1 D1.1
NetLS1_2: LS1.2 Q5.3 | length 4.1
  Top Layer w0.381: Q5.3 LS1.2
NetP7_2: P7.2 Q3.2 | length 10.1
  Top Layer w3: P7.2 37.24,48.11 Q3.2
NetP13_1: P13.1 U7.2 | length 37.2
  Bottom Layer w0.381: U7.2 111.252,64.262 114.046,61.468 114.046,45.466 P13.1
NetP13_2: P13.2 U7.3 | length 38.9
  Bottom Layer w0.381: U7.3 110.49,66.802 114.808,62.484 114.808,43.728 P13.2
NetP16_1: P16.1 R26.1 | length 10.8
  Bottom Layer w0.381: R26.1 75.3,50.43 P16.1
NetQ1_1: Q1.1 Q2.3 R4.2 | length 11.3
  Top Layer w0.508: Q1.1 55.118,55.88 56.388,57.15 56.388,59.817 57.386,60.815 Q2.3 59.32,61.715 R4.2
NetQ2_1: Q2.1 R6.2 | length 2.6
  Top Layer w0.381: R6.2@57.47,55.93 Q2.1
NetQ3_1: Q3.1 Q4.3 R7.2 | length 10.3
  Top Layer w0.381: Q3.1 49.98,45.027 51.798,46.845 Q4.3 54.61,47.879 55.51,48.779 R7.2
NetQ4_1: Q4.1 R8.2 | length 2.7
  Top Layer w0.381: Q4.1 53.71,44.545 R8.2
NetQ5_1: Q5.1 R10.1 | length 2.9
  Top Layer w0.381: Q5.1 63.645,77.372 R10.1
NetQ6_1: Q6.1 Q7.3 R12.2 | length 10.6
  Top Layer w0.508: Q6.1 49.98,91.89 53.195,95.105 Q7.3 57.023,96.248 R12.2@57.023,97.547
NetQ7_1: Q7.1 R13.2 | length 2.6
  Top Layer w0.508: R13.2@54.93,90.22 Q7.1
NetQ8_1: Q8.1 Q9.3 R16.2 | length 11.3
  Top Layer w0.508: Q8.1 52.52,79.19 57.005,83.675 Q9.3 59.32,84.575 R16.2
NetQ9_1: Q9.1 R17.2 | length 2.7
  Top Layer w0.381: Q9.1 57.52,81.375 R17.2
NetR9_1: R9.1 U2.3 | length 7.7
  Top Layer w0.381: U2.3 110.935,116.65 v3(112.395,118.11)
  Bottom Layer w0.381: v3(112.395,118.11) 112.395,119.115 R9.1
NetR11_1: R11.1 U2.10 | length 6.2
  Top Layer w0.381: v3(118.872,109.728) 120.272,109.728 121.35,108.65 U2.10
  Bottom Layer w0.381: R11.1 118.48,109.336 v3(118.872,109.728)
NetR25_2: R25.2 U6.60 | length 6.4
  Top Layer w0.254: U6.60 89.38,80.772 89.476,80.676 89.476,77.903 89.687,77.691 89.687,77.053 R25.2
NetR26_2: R26.2 U10.3 | length 9
  Top Layer w0.381: v3(80.645,57.785) U10.3
  Bottom Layer w0.381: R26.2 78.994,54.61 80.645,56.261 v3(80.645,57.785)
NetR27_1: R27.1 R30.2 U10.2 | length 7.4
  Top Layer w0.254: U10.2 79.375,62.865 v3(79.502,62.992)
  Top Layer w0.381: U10.2 79.375,58.42 v3(79.386,58.409)
  Bottom Layer w0.254: v3(79.502,62.992) 79.502,63.235 R27.1
  Bottom Layer w0.381: R30.2 v3(79.386,58.409)
NetR27_2: R27.2 R28.2 U10.1 | length 8.8
  Top Layer w0.254: U10.1 78.105,62.484 v3(78.475,62.854)
  Bottom Layer w0.254: v3(78.475,62.854) R27.2
  Bottom Layer w0.381: R28.2 74.157,64.632 74.803,65.278 77.205,65.278 R27.2
PGND: C1.2 C5.2 C6.2 C11.1 D1.2 P1.3 P2.3 P3.2 P4.3 P6.7 P14.3 P15.3 P16.2 pad.0 Q1.3 Q3.3 Q5.2 Q6.3 Q8.3 R1.1 R3.2 R5.2 R29.1 R30.1 U1.5 U3.2 U7.5 U10.8 | length 109.3
  Top Layer w0.508: v2(63.645,71.265) Q5.2
  Top Layer w1: v4(49.022,83.82) Q8.3 ; v4(49.022,105.41) C5.2 ; v4(49.53,101.6) C6.2 52.44,97.398 51.562,96.52 Q6.3 ; U3.2@53.34,116.84 U3.2 ; v4(60.014,112.014) R1.1
  Top Layer w2: v6(51.555,58.414) 51.81,58.414 53.79,60.394 Q1.3
  Top Layer w3: v6@48,50.24 Q3.3
  Bottom Layer w1: v4(60.014,112.014) v4(60.014,117.986)
  Bottom Layer w2: 48.514,58.166 48.761,58.413 v6@51.555,58.413
  Bottom Layer w5: P3.2 48.514,108.306 48.514,58.414 ; v6@48,52 48.514,52.514 48.514,58.166
  other v2: 50,118 52,118 54,118 56,118 58,118 50,120 52,120 54,120 56,120 58,120 50,122 52,122 54,122 56,122 58,122 50,124 52,124 54,124 56,124 58,124
  other v6: 48.006,50.8
PUMP1: P1.2 U6.62 | length 37.4
  Top Layer w0.254: U6.62 90.38,77.768 90.678,77.47 v1(93.599,77.47) ; v1(95.25,69.723) 95.25,66.675 96.393,65.532 104.013,65.532 105.389,64.156 105.389,57.169 P1.2
  Bottom Layer w0.254: v1(93.599,77.47) 95.25,75.819 v1(95.25,69.723)
PUMP2: R6.1 U6.37 | length 53.2
  Top Layer w0.254: R6.1 59.69,55.88 v1(60.96,57.15) ; v1(65.405,89.535) 65.56,89.38 U6.37
  Bottom Layer w0.254: v1(60.96,57.15) 60.96,84.455 64.897,88.392 64.897,89.027 v1(65.405,89.535)
PUMP_BAK: R17.1 U6.35 | length 30.3
  Top Layer w0.254: R17.1 59.69,78.74 v1(61.595,80.645) ; v1(66.758,90.38) U6.35
  Bottom Layer w0.254: v1(61.595,80.645) 61.595,84.074 66.04,88.519 66.04,89.662 v1(66.758,90.38)
SGND: BT1.2 C3.2 C4.2 C7.2 C8.2 C14.2 C15.2 C18.1 C19.1 C20.2 C22.2 C23.1 C24.2 C26.2 P9.2 P9.11 P11.4 P12.4 pad.1 Q2.2 Q4.2 Q7.2 Q9.2 R1.2 R11.2 R18.1 R22.1 R22.2 R22.3 R22.4 R22.7 S1.1 U2.9 U4.1 U5.1 U5.4 U5.8 U6.12 U6.18 U6.31 U6.47 U6.63 U8.1 U9.4 | length 102
  Top Layer w0.254: v1(89.027,89.535) 89.215,89.347 93.155,89.347 U6.12 ; U6.18 90.88,92.253 v1(90.913,92.22)
  Top Layer w0.508: Q4.2 56.025,44.595 61.722,50.292 ; v7(59.37,59.878) Q2.2 60.942,58.565 61.722,57.785 61.722,50.292 ; P11.4 72.263,57.277 72.263,49.276 71.755,48.768 63.246,48.768 61.722,50.292 ; C4.2 99.89,121.48 98.552,120.142 98.552,114.681 v7(103.759,109.474)
  Top Layer w1: C8.2 63.892,109.172 R1.2 63.87,112.036 C7.2 ; C7.2@63.74,114.3 U4.1 ; P9.2 123.444,70.104 v4(123.444,76.454)
  Bottom Layer w0.254: v1(90.913,92.22) v1@91.058,92.075
  Bottom Layer w0.508: v7(59.37,59.878) 59.944,60.452 v7(59.944,76.454)
  other v1: 93.726,80.137
  other v2: 80,78 102,78 84,106 118,106 58.674,107.95
SR_D0: P9.6 U6.9 | length 36.5
  Top Layer w0.254: U6.9 94.731,87.88 96.012,89.161 113.912,89.161 v1(115.189,87.884)
  Bottom Layer w0.254: v1(115.189,87.884) 115.189,80.391 P9.6
SR_D1: P9.7 U6.10 | length 35
  Top Layer w0.254: U6.10 94.19,88.38 95.377,89.567 115.09,89.567 116.205,88.452 v1(116.205,88.011)
  Bottom Layer w0.254: v1(116.205,88.011) 116.205,81.915 P9.7
SR_D2: P9.8 U6.11 | length 33
  Top Layer w0.254: U6.11 94.087,88.88 95.181,89.974 115.258,89.974 v1(117.094,88.138)
  Bottom Layer w0.254: v1(117.094,88.138) 117.094,83.566 P9.8
SR_LED: P9.3
SR_SW: P9.4
SR_VT: P9.5 U6.14 | length 45.9
  Top Layer w0.254: U6.14 120.821,90.38 121.92,89.281 121.92,76.2 P9.5
SWCLK: P11.3 U6.49 | length 35.8
  Top Layer w0.254: P11.3 69.723,59.563 72.771,59.563 v1(73.152,59.944) ; v1(76.835,81.915) 77.025,82.105 U6.49
  Bottom Layer w0.254: v1(73.152,59.944) 73.152,68.834 74.422,70.104 74.422,79.502 v1(76.835,81.915)
SWDIO: P11.2 U6.46 | length 39.3
  Top Layer w0.254: P11.2 66.04,59.436 66.675,60.071 72.009,60.071 v1(72.517,60.579) ; v1(76.879,84.88) U6.46
  Bottom Layer w0.254: v1(72.517,60.579) 72.517,69.342 73.66,70.485 73.66,81.661 v1(76.879,84.88)
TEM: R19.1 U6.39 U8.2 | length 30
  Top Layer w0.254: U8.2 70.104,97.79 70.623,98.309 R19.1 ; v1(72.136,88.011) 72.505,88.38 U6.39
  Bottom Layer w0.254: U8.2 69.977,97.79 70.485,97.282 70.485,88.265 70.739,88.011 v1(72.136,88.011)
TTIM_IO: U6.22 U9.6 | length 16.5
  Top Layer w0.254: U6.22 88.88,96.433 91.606,99.159 91.606,101.413 90.75,102.268 90.75,106.117 91.059,106.426 U9.6
TTIM_RSI: U6.23 U9.5 | length 18.1
  Top Layer w0.254: U6.23 88.38,96.508 91.199,99.327 91.199,101.206 90.297,102.108 90.297,107.061 90.932,107.696 U9.5
TTIM_SCLK: U6.21 U9.7 | length 15.8
  Top Layer w0.254: U6.21 89.38,93.952 94.615,99.187 94.615,104.521 93.98,105.156 U9.7
WIFI_RX: U2.15 U6.16 | length 52.4
  Top Layer w0.254: U6.16 109.795,91.38 v1(113.03,94.615) ; v1(117.38,118.65) U2.15
  Bottom Layer w0.254: v1(113.03,94.615) 113.03,114.3 v1(117.38,118.65)
WIFI_TX: U2.16 U6.17 | length 54.7
  Top Layer w0.254: U6.17 110.3,93.155 v1(111.76,94.615) ; v1(117.222,120.65) U2.16
  Bottom Layer w0.254: v1(111.76,94.615) 111.76,115.188 v1(117.222,120.65)
YF_BUSY: U6.2 U7.8 | length 29.4
  Top Layer w0.254: U6.2 94.69,84.38 94.996,84.074 94.996,79.502 94.742,79.248 94.742,77.47 v1(97.409,74.803)
  Bottom Layer w0.254: U7.8 92.837,63.119 95.25,63.119 97.409,65.278 v1(97.409,74.803)
YF_DATA: U6.3 U7.7 | length 26.8
  Top Layer w0.254: U6.3 95.214,84.88 95.606,84.488 95.606,79.477 95.25,79.121 95.25,77.851 96.52,76.581 v1(96.647,76.581)
  Bottom Layer w0.254: U7.7 93.091,64.262 96.647,67.818 v1(96.647,76.581)
YF_RESET: U6.4 U7.6 | length 24.1
  Top Layer w0.254: U6.4 95.468,85.38 96.012,84.836 v1(96.012,78.613)
  Bottom Layer w0.254: U7.6 93.345,66.802 96.012,69.469 v1(96.012,78.613)
pads on no net: BT1.3 BT1.4 P9.1 P9.9 R5.3 U1.3 U1.4 U2.2 U2.4 U2.5 U2.6 U2.7 U2.11 U2.12 U2.13 U2.14 U4.4 U5.0 U5.2 U5.5 U5.10 U6.1 U6.24 U6.25 U6.40 U6.42 U6.43 U6.54 U6.61 U10.5 U10.6 U10.7

## Polygon pours and split planes (outlines as drawn)
PGND on Top Layer "Top PGND" (solid, remove dead copper, pour order 5): 124,126 46,126 46,40 116,40 116,72 52,72 52,114 124,114
SGND on Top Layer "Top SGND" (solid, remove dead copper, pour order 6): 124,110 56,110 56,76 124,76
PGND on Bottom Layer "Bottom PGND" (solid, remove dead copper, pour order 7): 124,126 46,126 46,40 116,40 116,72 52,72 52,114 124,114
SGND on Bottom Layer "Bottom SGND" (solid, remove dead copper, pour order 8): 124,110 124,76 56,76 56,110

## Silkscreen, mask and mechanical layers (free items; w line width, h text height)
Top Overlay:
  text "+3.3V" at 67.056,112.522 h1.27
  text "+5V" at 69.342,109.982 h1.27
  text "SGND" at 60.198,101.092 h1.27
  text "PGND" at 112.522,68.326 h1.27
Mechanical 1:
  the board outline again, w0.203

## Text inside footprints (layer, text, board x,y; h text height)
P9: Top Overlay "ANT" at 118.11,45.72 h1 r270